# EAGLE board led-test (EAGLE 8.3.2)
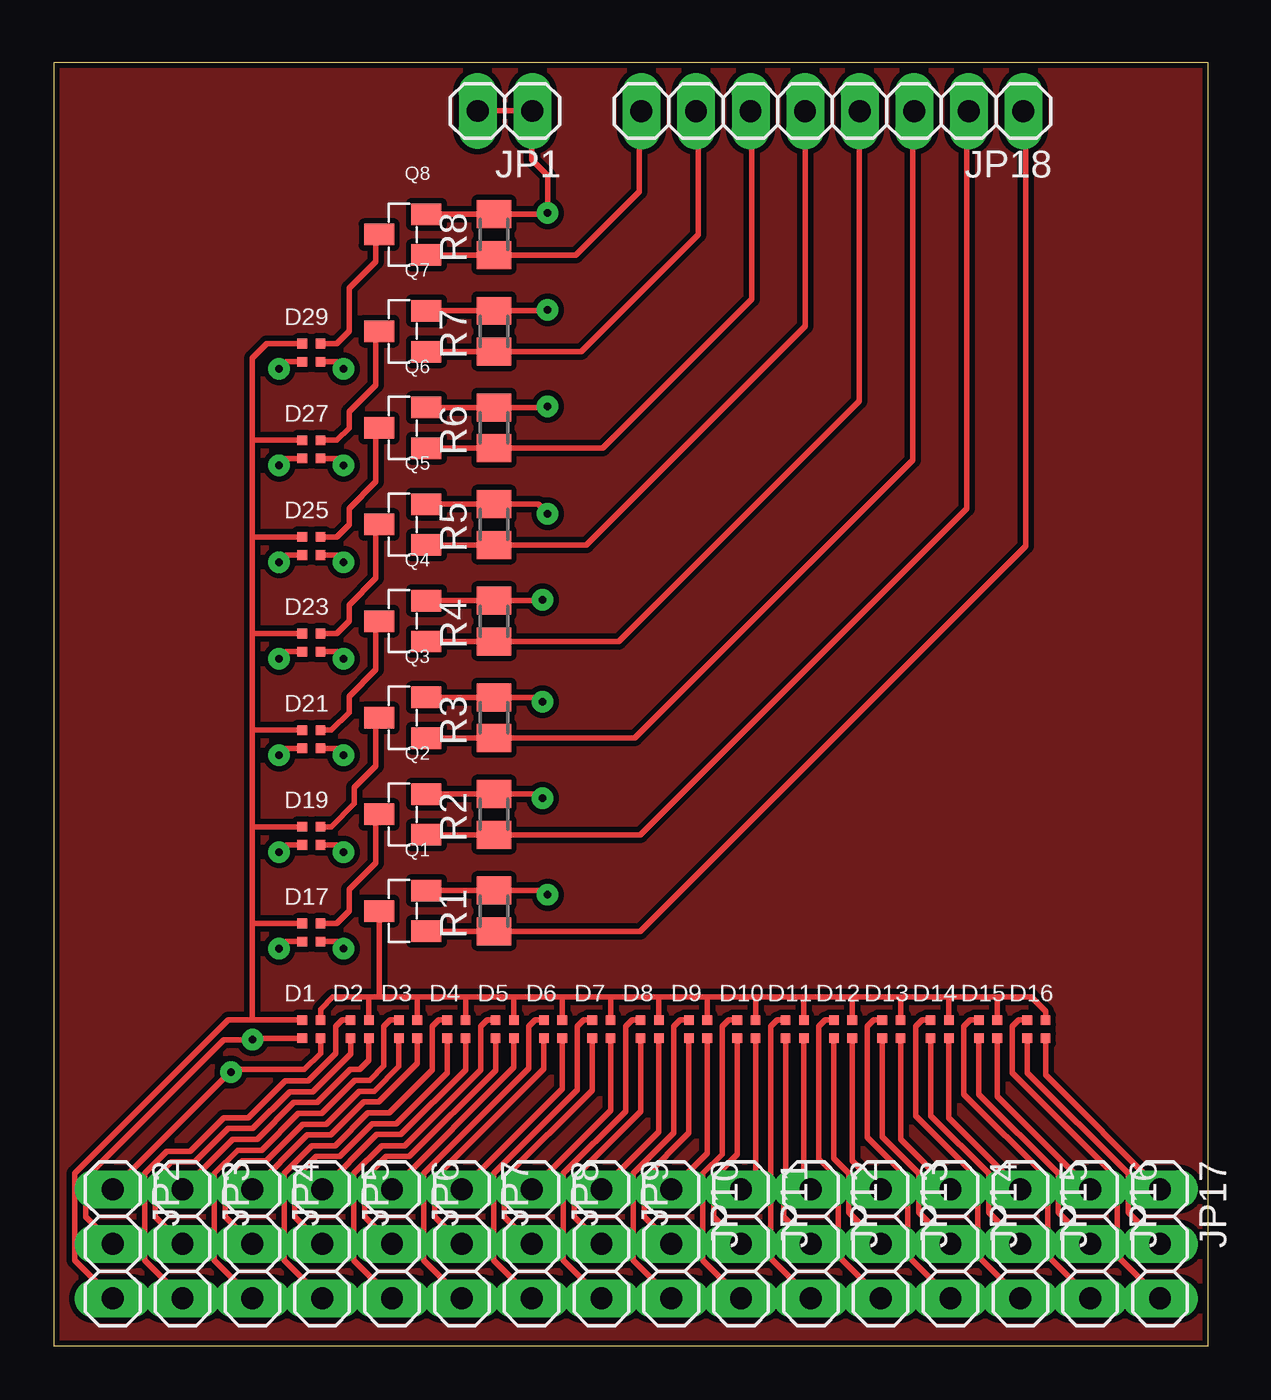
[diagram p0: board, top side]
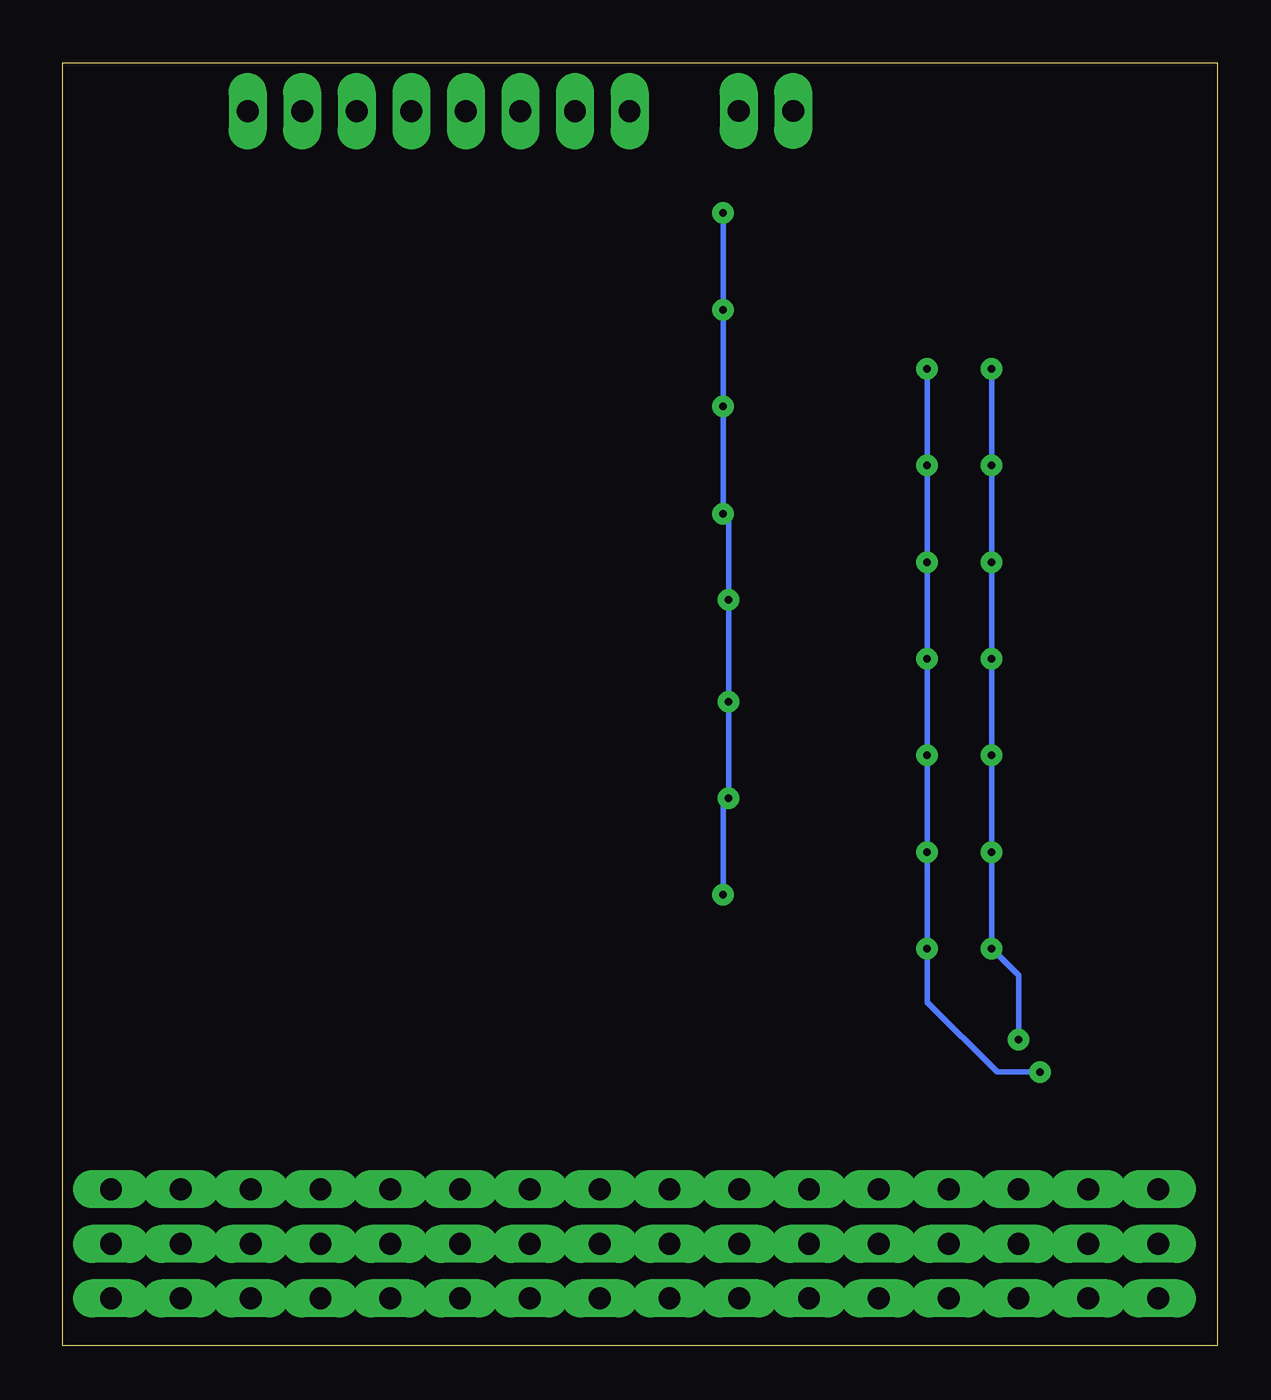
[diagram p1: board, bottom side, seen from below]

Size 53.75 x 59.75 mm. Coordinates in mm from the lower left corner, seen from the top.
Outline: 0,0 53.75,0 53.75,59.75 0,59.75 0,0
Copper layers (1*16): Top 0.035mm / dielectric 1.5mm / Bottom 0.035mm
Design rules "default *": minimum track width 6mil, minimum drill 0.35mm, track to track 10mil, track to pad 10mil, pad to pad 10mil, via to via 10mil, smd to smd 10mil, copper to edge 10mil, drill to drill 6mil, minimum pad ring 15mil, minimum via ring 8mil, stop-mask expansion 4mil, vias tented up to drill 0mil, thermal gap 10mil

## Footprints (pad centres in the part's own frame; a part is rotated, then mirrored left to right if it is on the bottom)
LED3 = smd 0.45 x 0.45: B -0.425,0.425; G -0.425,-0.425; R 0.425,-0.425; VCC 0.425,0.425
1X02 = drill 1.016 long: 1 -1.27,0; 2 1.27,0
1X03 = drill 1.016 long: 1 -2.54,0; 2 0,0; 3 2.54,0
1X08 = drill 1.016 long: 1 -8.89,0; 2 -6.35,0; 3 -3.81,0; 4 -1.27,0; 5 1.27,0; 6 3.81,0; 7 6.35,0; 8 8.89,0
SOT23-3 = smd 1 x 1.4: 1 -0.95,-1.1; 2 0.95,-1.1; 3 0,1.1
M0805 = smd 1.3 x 1.6: 1 -0.95,0; 2 0.95,0

## Placement (x,y rotation side)
D1  LED3  [LED3]  12,14.75 0 top
D2  LED3  [LED3]  14.25,14.75 0 top
D3  LED3  [LED3]  16.5,14.75 0 top
D4  LED3  [LED3]  18.75,14.75 0 top
D5  LED3  [LED3]  21,14.75 0 top
D6  LED3  [LED3]  23.25,14.75 0 top
D7  LED3  [LED3]  25.5,14.75 0 top
D8  LED3  [LED3]  27.75,14.75 0 top
D9  LED3  [LED3]  30,14.75 0 top
D10  LED3  [LED3]  32.25,14.75 0 top
D11  LED3  [LED3]  34.5,14.75 0 top
D12  LED3  [LED3]  36.75,14.75 0 top
D13  LED3  [LED3]  39,14.75 0 top
D14  LED3  [LED3]  41.25,14.75 0 top
D15  LED3  [LED3]  43.5,14.75 0 top
D16  LED3  [LED3]  45.75,14.75 0 top
D17  LED3  [LED3]  12,19.25 0 top
D19  LED3  [LED3]  12,23.75 0 top
D21  LED3  [LED3]  12,28.25 0 top
D23  LED3  [LED3]  12,32.75 0 top
D25  LED3  [LED3]  12,37.25 0 top
D27  LED3  [LED3]  12,41.75 0 top
D29  LED3  [LED3]  12,46.25 0 top
JP1  [1X02]  21.01,57.51 180 top
JP2  [1X03]  2.75,4.75 270 top
JP3  [1X03]  6,4.75 270 top
JP4  [1X03]  9.25,4.75 270 top
JP5  [1X03]  12.5,4.75 270 top
JP6  [1X03]  15.75,4.75 270 top
JP7  [1X03]  19,4.75 270 top
JP8  [1X03]  22.25,4.75 270 top
JP9  [1X03]  25.5,4.75 270 top
JP10  [1X03]  28.75,4.75 270 top
JP11  [1X03]  32,4.75 270 top
JP12  [1X03]  35.25,4.75 270 top
JP13  [1X03]  38.5,4.75 270 top
JP14  [1X03]  41.75,4.75 270 top
JP15  [1X03]  45,4.75 270 top
JP16  [1X03]  48.25,4.75 270 top
JP17  [1X03]  51.5,4.75 270 top
JP18  [1X08]  36.25,57.5 180 top
Q1  AO3401  [SOT23-3]  16.25,20.25 90 top
Q2  AO3401  [SOT23-3]  16.25,24.75 90 top
Q3  AO3401  [SOT23-3]  16.25,29.25 90 top
Q4  AO3401  [SOT23-3]  16.25,33.75 90 top
Q5  AO3401  [SOT23-3]  16.25,38.25 90 top
Q6  AO3401  [SOT23-3]  16.25,42.75 90 top
Q7  AO3401  [SOT23-3]  16.25,47.25 90 top
Q8  AO3401  [SOT23-3]  16.25,51.75 90 top
R1  100k  [M0805]  20.5,20.25 90 top
R2  100k  [M0805]  20.5,24.75 90 top
R3  100k  [M0805]  20.5,29.25 90 top
R4  100k  [M0805]  20.5,33.75 90 top
R5  100k  [M0805]  20.5,38.25 90 top
R6  100k  [M0805]  20.5,42.75 90 top
R7  100k  [M0805]  20.5,47.25 90 top
R8  100k  [M0805]  20.5,51.75 90 top

## Library data of the parts
D1-D17 D19 D21 D23 D25 D27 D29 = rose
JP1-JP18 = pinhead
Q1-Q8 = tuetuopay
R1-R8 = rcl

## Nets
+3V3: JP1.1 JP1.2 Q1.2 Q2.2 Q3.2 Q4.2 Q5.2 Q6.2 Q7.2 Q8.2 R1.2 R2.2 R3.2 R4.2 R5.2 R6.2 R7.2 R8.2
B0: D1.B D17.B D19.B D21.B D23.B D25.B D27.B D29.B JP2.3
B1: D2.B JP3.3
B2: D3.B JP4.3
B3: D4.B JP5.3
B4: D5.B JP6.3
B5: D6.B JP7.3
B6: D7.B JP8.3
B7: D8.B JP9.3
B8: D9.B JP10.3
B9: D10.B JP11.3
B10: D11.B JP12.3
B11: D12.B JP13.3
B12: D13.B JP14.3
B13: D14.B JP15.3
B14: D15.B JP16.3
B15: D16.B JP17.3
G0: D1.G D17.G D19.G D21.G D23.G D25.G D27.G D29.G JP2.2
G1: D2.G JP3.2
G2: D3.G JP4.2
G3: D4.G JP5.2
G4: D5.G JP6.2
G5: D6.G JP7.2
G6: D7.G JP8.2
G7: D8.G JP9.2
G8: D9.G JP10.2
G9: D10.G JP11.2
G10: D11.G JP12.2
G11: D12.G JP13.2
G12: D13.G JP14.2
G13: D14.G JP15.2
G14: D15.G JP16.2
G15: D16.G JP17.2
MUX0: JP18.1 Q1.1 R1.1
MUX1: JP18.2 Q2.1 R2.1
MUX2: JP18.3 Q3.1 R3.1
MUX3: JP18.4 Q4.1 R4.1
MUX4: JP18.5 Q5.1 R5.1
MUX5: JP18.6 Q6.1 R6.1
MUX6: JP18.7 Q7.1 R7.1
MUX7: JP18.8 Q8.1 R8.1
R0: D1.R D17.R D19.R D21.R D23.R D25.R D27.R D29.R JP2.1
R1: D2.R JP3.1
R2: D3.R JP4.1
R3: D4.R JP5.1
R4: D5.R JP6.1
R5: D6.R JP7.1
R6: D7.R JP8.1
R7: D8.R JP9.1
R8: D9.R JP10.1
R9: D10.R JP11.1
R10: D11.R JP12.1
R11: D12.R JP13.1
R12: D13.R JP14.1
R13: D14.R JP15.1
R14: D15.R JP16.1
R15: D16.R JP17.1
VCC0: D1.VCC D2.VCC D3.VCC D4.VCC D5.VCC D6.VCC D7.VCC D8.VCC D9.VCC D10.VCC D11.VCC D12.VCC D13.VCC D14.VCC D15.VCC D16.VCC Q1.3
VCC1: D17.VCC Q2.3
VCC2: D19.VCC Q3.3
VCC3: D21.VCC Q4.3
VCC4: D23.VCC Q5.3
VCC5: D25.VCC Q6.3
VCC6: D27.VCC Q7.3
VCC7: D29.VCC Q8.3

## Tracks (layer width: path | path; a pad name or v marks a point on that pad's centre or on a via)
+3V3  (via drill 0.35 pad 1)
  Top 0.25: Q8.2 R8.2 22.95,52.7 v23,52.75 23,54.5 22.25,55.25 22.25,57.51 | Q7.2 R7.2 22.95,48.2 v23,48.25 | Q6.2 R6.2 22.95,43.7 v23,43.75 | Q5.2 R5.2 22.55,39.2 v23,38.75 | Q4.2 R4.2 22.7,34.7 v22.75,34.75 | Q3.2 R3.2 22.55,30.2 v22.75,30 | Q2.2 R2.2 22.55,25.7 v22.75,25.5 | Q1.2 R1.2 22.8,21.2 v23,21 | 22.25,57.51 JP1.2 | 22.25,57.51 JP1.1
  Bottom 0.25: v23,21 23,25.25 v22.75,25.5 v22.75,30 v22.75,34.75 22.75,38.5 v23,38.75 v23,43.75 v23,48.25 v23,52.75
B0
  Top 0.25: JP2.3 0.98,3.98 0.98,8.02 8.13,15.18 9.25,15.18 | D29.B 9.93,46.67 9.25,46 9.25,42.25 9.25,42.17 | 9.25,42.17 9.25,37.75 9.25,37.67 | 9.25,37.67 9.25,33.5 9.25,33.17 | 9.25,33.17 9.25,28.75 9.25,28.67 | 9.25,24.17 9.25,28.67 | 9.25,19.68 9.25,15.18 | D27.B 9.25,42.17 | D25.B 9.25,37.67 | D23.B 9.25,33.17 | D21.B 9.25,28.67 | D19.B 9.25,24.17 | 9.25,24.17 9.25,24 9.25,19.75 9.25,19.68 | D17.B 9.25,19.68 | 9.25,15.18 D1.B
B1
  Top 0.25: D2.B 13.43,15.18 13.12,14.88 13.12,13.62 11.85,12.34 10.77,12.34 9.05,10.63 7.91,10.63 6.35,9.06 5.27,9.06 4.23,8.02 4.23,3.98 JP3.3
B2
  Top 0.25: D3.B 15.68,15.18 15.38,14.88 15.38,13.75 | 15.38,13.75 15.38,13.73 | JP4.3 7.48,3.98 7.48,7.5 | 7.48,7.5 7.48,8.02 | 15.38,13.75 15.38,13.03 14.71,12.36 14,12.36 12.48,10.83 11.4,10.83 9.68,9.11 8.57,9.11 7.48,8.02 | 7.48,8.02 7.48,7.5
B3
  Top 0.25: D4.B 17.92,15.18 17.62,14.88 17.62,12.85 15.62,10.85 14.63,10.85 13.1,9.32 12.02,9.32 10.73,8.02 10.73,3.98 JP5.3
B4
  Top 0.25: D5.B 20.17,15.18 19.88,14.88 19.88,12.84 16.35,9.32 15.27,9.32 13.98,8.02 13.98,3.98 JP6.3
B5
  Top 0.25: D6.B 22.42,15.18 22.12,14.88 22.12,12.92 17.23,8.02 17.23,3.98 JP7.3
B6
  Top 0.25: D7.B 24.67,15.18 24.38,14.88 24.38,11.92 20.48,8.02 20.48,3.98 JP8.3
B7
  Top 0.25: D8.B 26.92,15.18 26.62,14.88 26.62,10.92 23.73,8.02 23.73,3.98 JP9.3
B8
  Top 0.25: D9.B 29.17,15.18 28.88,14.88 28.88,9.92 26.98,8.02 26.98,3.98 JP10.3
B9
  Top 0.25: D10.B 31.42,15.18 31.12,14.88 31.12,8.92 30.23,8.02 30.23,3.98 JP11.3
B10
  Top 0.25: D11.B 33.67,15.18 33.38,14.88 33.38,4.09 JP12.3
B11
  Top 0.25: D12.B 35.92,15.18 35.62,14.88 35.62,8.71 36.52,7.81 36.52,4.19 JP13.3
B12
  Top 0.25: D13.B 38.17,15.18 37.88,14.88 37.88,9.71 39.77,7.81 39.77,4.19 JP14.3
B13
  Top 0.25: D14.B 40.42,15.18 40.12,14.88 40.12,10.71 43.02,7.81 43.02,4.19 JP15.3
B14
  Top 0.25: D15.B 42.67,15.18 42.38,14.88 42.38,11.71 46.27,7.81 46.27,4.19 JP16.3
B15
  Top 0.25: D16.B 44.92,15.18 44.62,14.88 44.62,12.71 49.52,7.81 49.52,4.19 JP17.3
G0  (via drill 0.35 pad 1)
  Top 0.25: JP2.2 1.48,6.02 1.48,7.81 7.92,14.25 v9.25,14.25 9.32,14.32 D1.G | D17.G 10.82,18.82 v10.5,18.5 | D19.G 10.82,23.32 v10.5,23 | D21.G 10.82,27.83 v10.5,27.5 | D23.G 10.82,32.33 v10.5,32 | D25.G 10.82,36.83 v10.5,36.5 | D27.G 10.82,41.33 v10.5,41 | D29.G 10.82,45.83 v10.5,45.5
  Bottom 0.25: v9.25,14.25 9.25,17.25 v10.5,18.5 v10.5,23 v10.5,27.5 v10.5,32 v10.5,36.5 v10.5,41 v10.5,45.5
G1
  Top 0.25: JP3.2 4.73,6.02 4.73,7.81 5.48,8.56 6.55,8.56 8.12,10.12 9.26,10.12 10.98,11.84 12.06,11.84 13.82,13.6 D2.G
G2
  Top 0.25: JP4.2 7.98,6.02 7.98,7.81 8.78,8.61 9.89,8.61 11.6,10.33 12.68,10.33 14.21,11.86 14.92,11.86 16.07,13.01 D3.G
G3
  Top 0.25: D4.G 18.33,12.72 15.95,10.34 14.84,10.34 13.31,8.81 12.23,8.81 11.23,7.81 11.23,6.02 JP5.2
G4
  Top 0.25: D5.G 20.58,12.83 16.56,8.81 15.48,8.81 14.48,7.81 14.48,6.02 JP6.2
G5
  Top 0.25: D6.G 22.83,12.91 17.73,7.81 17.73,6.02 JP7.2
G6
  Top 0.25: D7.G 25.08,11.91 20.98,7.81 20.98,6.02 JP8.2
G7
  Top 0.25: D8.G 27.33,10.91 24.23,7.81 24.23,6.02 JP9.2
G8
  Top 0.25: D9.G 29.58,9.91 27.48,7.81 27.48,6.02 JP10.2
G9
  Top 0.25: D10.G 31.83,8.91 30.73,7.81 30.73,6.02 JP11.2
G10
  Top 0.25: D11.G 34.08,7.91 33.98,7.81 33.98,6.02 JP12.2
G11
  Top 0.25: D12.G 36.33,8.72 37.02,8.02 37.02,6.23 JP13.2
G12
  Top 0.25: D13.G 38.58,9.72 40.27,8.02 40.27,6.23 JP14.2
G13
  Top 0.25: D14.G 40.83,10.72 43.52,8.02 43.52,6.23 JP15.2
G14
  Top 0.25: D15.G 43.08,11.72 46.77,8.02 46.77,6.23 JP16.2
G15
  Top 0.25: D16.G 45.33,12.72 50.02,8.02 50.02,6.23 JP17.2
GND
  pour Top: 0,59.75 53.75,59.75 53.75,0 0,0
MUX0
  Top 0.25: Q1.1 R1.1 27.3,19.3 45.25,37.25 45.25,57.39 JP18.1
MUX1
  Top 0.25: Q2.1 R2.1 27.3,23.8 42.5,39 42.5,57.4 JP18.2
MUX2
  Top 0.25: Q3.1 R3.1 27.05,28.3 40,41.25 40,57.44 JP18.3
MUX3
  Top 0.25: Q4.1 R4.1 26.3,32.8 37.5,44 37.5,57.48 JP18.4
MUX4
  Top 0.25: Q5.1 R5.1 24.8,37.3 35,47.5 35,57.48 JP18.5
MUX5
  Top 0.25: Q6.1 R6.1 25.55,41.8 32.5,48.75 32.5,57.44 JP18.6
MUX6
  Top 0.25: Q7.1 R7.1 24.55,46.3 30,51.75 30,57.4 JP18.7
MUX7
  Top 0.25: Q8.1 R8.1 24.3,50.8 27.25,53.75 27.25,57.39 JP18.8
R0  (via drill 0.35 pad 1)
  Top 0.25: D1.R 12.43,13.63 11.66,12.86 8.36,12.86 v8.25,12.75 8.21,12.75 JP2.1 | D17.R 13.18,18.82 v13.5,18.5 | D19.R 13.18,23.32 v13.5,23 | D21.R 13.18,27.83 v13.5,27.5 | D23.R 13.18,32.33 v13.5,32 | D25.R 13.18,36.83 v13.5,36.5 | D27.R 13.18,41.33 v13.5,41 | D29.R 13.18,45.83 v13.5,45.5
  Bottom 0.25: v8.25,12.75 10.25,12.75 13.5,16 v13.5,18.5 v13.5,23 v13.5,27.5 v13.5,32 v13.5,36.5 v13.5,41 v13.5,45.5
R1
  Top 0.25: D2.R 14.68,13.29 14.25,12.86 13.8,12.86 12.27,11.33 11.19,11.33 9.47,9.62 8.33,9.62 JP3.1
R2
  Top 0.25: D3.R 16.93,13.15 15.89,12.11 | 15.89,12.11 15.88,12.1 | 15.89,12.11 15.12,11.35 14.42,11.35 14.13,11.06 | 14.13,11.06 | JP4.1 9.28,7.29 11.81,9.82 12.89,9.82 14.13,11.06
R3
  Top 0.25: D4.R 19.17,12.85 16.16,9.84 15.05,9.84 JP5.1
R4
  Top 0.25: D5.R 21.42,12.96 JP6.1
R5
  Top 0.25: D6.R 23.67,11.96 JP7.1
R6
  Top 0.25: D7.R 25.92,10.96 JP8.1
R7
  Top 0.25: D8.R 28.17,9.96 JP9.1
R8
  Top 0.25: D9.R 30.42,8.96 JP10.1
R9
  Top 0.25: D10.R 32.67,7.96 JP11.1
R10
  Top 0.25: D11.R 34.92,7.62 JP12.1
R11
  Top 0.25: D12.R 37.17,8.61 JP13.1
R12
  Top 0.25: D13.R 39.42,9.61 JP14.1
R13
  Top 0.25: D14.R 41.67,10.61 JP15.1
R14
  Top 0.25: D15.R 43.92,11.61 JP16.1
R15
  Top 0.25: D16.R 46.17,12.61 JP17.1
VCC0
  Top 0.25: D1.VCC 12.43,15.68 13,16.25 14.75,16.25 | D16.VCC 46.17,15.57 45.5,16.25 44,16.25 | 41.75,16.25 44,16.25 | 39.5,16.25 41.75,16.25 | 37.25,16.25 39.5,16.25 | 35,16.25 37.25,16.25 | 32.5,16.25 35,16.25 | 30.5,16.25 32.5,16.25 | 28.25,16.25 30.5,16.25 | 26,16.25 28.25,16.25 | 23.5,16.25 26,16.25 | 21.5,16.25 23.5,16.25 | 19,16.25 21.5,16.25 | 17,16.25 19,16.25 | 14.75,16.25 17,16.25 | D15.VCC 43.92,16.25 44,16.25 | D14.VCC 41.67,16.25 41.75,16.25 | D13.VCC 39.42,16.25 39.5,16.25 | D12.VCC 37.17,16.25 37.25,16.25 | D11.VCC 34.92,16.25 35,16.25 | D10.VCC 32.67,16.25 32.5,16.25 | D9.VCC 30.42,16.25 30.5,16.25 | D8.VCC 28.17,16.25 28.25,16.25 | D7.VCC 25.92,16.25 26,16.25 | D6.VCC 23.67,16.25 23.5,16.25 | D5.VCC 21.42,16.25 21.5,16.25 | D4.VCC 19.17,16.25 19,16.25 | D3.VCC 16.93,16.25 17,16.25 | D2.VCC 14.68,16.25 14.75,16.25 | Q1.3 15.15,16.25 14.75,16.25
VCC1
  Top 0.25: D17.VCC 13.18,19.68 13.75,20.25 13.75,21.25 15,22.5 15,24.6 Q2.3
VCC2
  Top 0.25: D19.VCC 12.93,24.17 14,25.25 14,26 15,27 15,29.1 Q3.3
VCC3
  Top 0.25: D21.VCC 12.93,28.67 13.75,29.5 13.75,30.25 15,31.5 15,33.6 Q4.3
VCC4
  Top 0.25: D23.VCC 13.18,33.17 13.75,33.75 13.75,34.5 15,35.75 15,38.1 Q5.3
VCC5
  Top 0.25: D25.VCC 13.18,37.67 13.75,38.25 13.75,39 15,40.25 15,42.6 Q6.3
VCC6
  Top 0.25: D27.VCC 13.18,42.17 13.75,42.75 13.75,43.5 15,44.75 15,47.1 Q7.3
VCC7
  Top 0.25: D29.VCC 13.18,46.67 13.75,47.25 13.75,49.25 15,50.5 15,51.6 Q8.3